# Altium PCB Luke_Optical_Fibre_IGBT_Driver_PCB.PcbDoc
Units mm, origin at the board's own origin, x right, y up, seen from the top; angles counter-clockwise.
Board outline 113.6 x 34.23 mm, 2 copper layers (Top Layer, Bottom Layer); 38 components, 25 nets, 106 pads, 346 vias.
Unrouted connection lines stored in the file: 1.
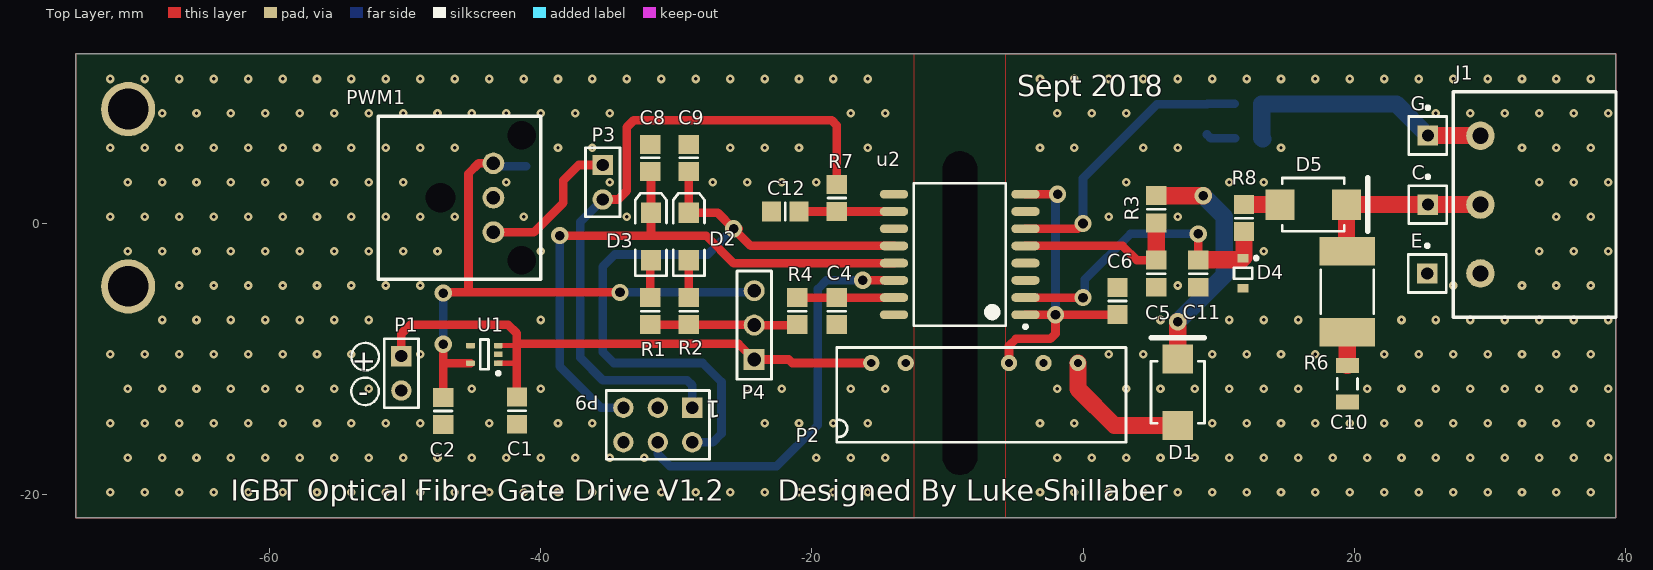
[diagram p0: Top Layer view]
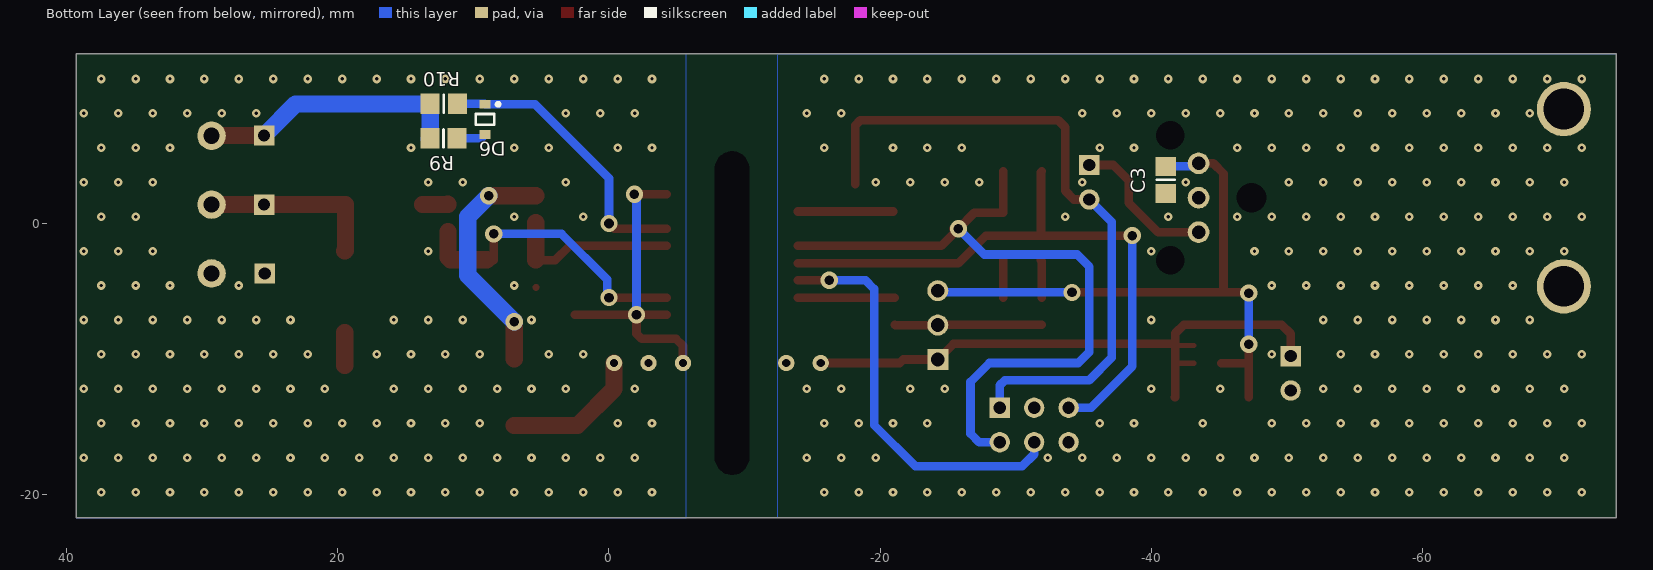
[diagram p1: Bottom Layer view, seen from below]

## Layer stack, top to bottom
Top Solder: solder mask 0.0102, Solder Resist, Dk 3.5
Top Layer: signal copper 0.0356
Dielectric 1: dielectric 0.32, FR-4, Dk 4.8
Bottom Layer: signal copper 0.0356
Bottom Solder: solder mask 0.0102, Solder Resist, Dk 3.5

## Board outline
-74.295,12.509 -74.295,-21.717 39.306,-21.717 39.306,12.509

## Design rules (kind name [scope] priority, off if disabled: settings)
Clearance "Schematic Clearance Constraint" [InNet('Collector/Drain')] p1: gap=3.048 ignorepadtopadclearanceinfootprint=FALSE except(0: Arc-Hole Track-Hole SMDPad-Hole THPad-Hole Via-Hole Fill-Hole Poly-Hole Region-Hole Text-Hole; 0.152: Arc-Text Track-Text SMDPad-Text THPad-Text Via-Text Fill-Text Poly-Text Region-Text Text-Text)
Clearance [All] p2: gap=0.152 ignorepadtopadclearanceinfootprint=FALSE except(0: Arc-Hole Track-Hole SMDPad-Hole THPad-Hole Via-Hole Fill-Hole Poly-Hole Region-Hole Text-Hole)
HoleSize [All] p1: absolutevalues=TRUE maxlimit=6.3 minlimit=0.2 maxpercent=80.000 minpercent=20.000
HoleToHoleClearance [All] p1: gap=0.152 allowstackedmicrovias=TRUE
MinimumSolderMaskSliver [All] p1: minsoldermaskwidth=0.152
PolygonConnect PolygonConnect_10 [All vs IsNamedPolygon('NONET_L02_P027')] p1: thpad.connectstyle=Relief thpad.reliefconductorwidth=0.254 thpad.reliefentries=4 thpad.polygonreliefangle="90 Angle" thpad.airgapwidth=0.254 smdpad.connectstyle=Relief smdpad.reliefconductorwidth=0.254 smdpad.reliefentries=4 smdpad.polygonreliefangle="90 Angle" smdpad.airgapwidth=0.254 via.connectstyle=Direct via.reliefconductorwidth=0.254 via.reliefentries=4 via.polygonreliefangle="90 Angle" via.airgapwidth=0.254
PolygonConnect PolygonConnect_9 [All vs IsNamedPolygon('Top Layer-No Emitter/Source')] p2: thpad.connectstyle=Relief thpad.reliefconductorwidth=0.254 thpad.reliefentries=4 thpad.polygonreliefangle="90 Angle" thpad.airgapwidth=0.254 smdpad.connectstyle=Relief smdpad.reliefconductorwidth=0.254 smdpad.reliefentries=4 smdpad.polygonreliefangle="90 Angle" smdpad.airgapwidth=0.254 via.connectstyle=Direct via.reliefconductorwidth=0.254 via.reliefentries=4 via.polygonreliefangle="90 Angle" via.airgapwidth=0.254
PolygonConnect PolygonConnect_8 [All vs IsNamedPolygon('Bottom Layer-GND')] p3: thpad.connectstyle=Relief thpad.reliefconductorwidth=0.254 thpad.reliefentries=4 thpad.polygonreliefangle="90 Angle" thpad.airgapwidth=0.254 smdpad.connectstyle=Relief smdpad.reliefconductorwidth=0.254 smdpad.reliefentries=4 smdpad.polygonreliefangle="90 Angle" smdpad.airgapwidth=0.254 via.connectstyle=Direct via.reliefconductorwidth=0.254 via.reliefentries=4 via.polygonreliefangle="90 Angle" via.airgapwidth=0.254
PolygonConnect PolygonConnect_7 [All vs IsNamedPolygon('Top Layer-Emitter')] p4: thpad.connectstyle=Relief thpad.reliefconductorwidth=0.254 thpad.reliefentries=4 thpad.polygonreliefangle="90 Angle" thpad.airgapwidth=0.254 smdpad.connectstyle=Relief smdpad.reliefconductorwidth=0.254 smdpad.reliefentries=4 smdpad.polygonreliefangle="90 Angle" smdpad.airgapwidth=0.254 via.connectstyle=Direct via.reliefconductorwidth=0.254 via.reliefentries=4 via.polygonreliefangle="90 Angle" via.airgapwidth=0.254
PolygonConnect PolygonConnect_6 [All vs IsNamedPolygon('Bottom Layer-Emitter')] p5: thpad.connectstyle=Relief thpad.reliefconductorwidth=0.254 thpad.reliefentries=4 thpad.polygonreliefangle="90 Angle" thpad.airgapwidth=0.254 smdpad.connectstyle=Relief smdpad.reliefconductorwidth=0.254 smdpad.reliefentries=4 smdpad.polygonreliefangle="90 Angle" smdpad.airgapwidth=0.254 via.connectstyle=Direct via.reliefconductorwidth=0.254 via.reliefentries=4 via.polygonreliefangle="90 Angle" via.airgapwidth=0.254
PolygonConnect PolygonConnect_5 [All vs IsNamedPolygon('Top Layer-GND 1')] p6: thpad.connectstyle=Relief thpad.reliefconductorwidth=0.254 thpad.reliefentries=4 thpad.polygonreliefangle="90 Angle" thpad.airgapwidth=0.254 smdpad.connectstyle=Relief smdpad.reliefconductorwidth=0.254 smdpad.reliefentries=4 smdpad.polygonreliefangle="90 Angle" smdpad.airgapwidth=0.254 via.connectstyle=Direct via.reliefconductorwidth=0.254 via.reliefentries=4 via.polygonreliefangle="90 Angle" via.airgapwidth=0.254
PolygonConnect PolygonConnect_4 [All vs IsNamedPolygon('EMITTER/SOURCE_L02_P016')] p7: thpad.connectstyle=Relief thpad.reliefconductorwidth=0.254 thpad.reliefentries=4 thpad.polygonreliefangle="90 Angle" thpad.airgapwidth=0.254 smdpad.connectstyle=Relief smdpad.reliefconductorwidth=0.254 smdpad.reliefentries=4 smdpad.polygonreliefangle="90 Angle" smdpad.airgapwidth=0.254 via.connectstyle=Direct via.reliefconductorwidth=0.254 via.reliefentries=4 via.polygonreliefangle="90 Angle" via.airgapwidth=0.254
PolygonConnect PolygonConnect_3 [All vs IsNamedPolygon('Top Layer-GND')] p8: thpad.connectstyle=Relief thpad.reliefconductorwidth=0.254 thpad.reliefentries=4 thpad.polygonreliefangle="90 Angle" thpad.airgapwidth=0.254 smdpad.connectstyle=Relief smdpad.reliefconductorwidth=0.254 smdpad.reliefentries=4 smdpad.polygonreliefangle="90 Angle" smdpad.airgapwidth=0.254 via.connectstyle=Direct via.reliefconductorwidth=0.254 via.reliefentries=4 via.polygonreliefangle="90 Angle" via.airgapwidth=0.254
PolygonConnect PolygonConnect_2 [All vs IsNamedPolygon('EMITTER/SOURCE_L02_P016')] p9: connectstyle=Relief reliefconductorwidth=0.254 reliefentries=4 polygonreliefangle="90 Angle" airgapwidth=0.254
PolygonConnect PolygonConnect_1 [All vs IsNamedPolygon('EMITTER/SOURCE_L02_P016')] p10: thpad.connectstyle=Direct thpad.reliefconductorwidth=0.254 thpad.reliefentries=4 thpad.polygonreliefangle="90 Angle" thpad.airgapwidth=0.254 smdpad.connectstyle=Relief smdpad.reliefconductorwidth=0.254 smdpad.reliefentries=4 smdpad.polygonreliefangle="90 Angle" smdpad.airgapwidth=0.254 via.connectstyle=Relief via.reliefconductorwidth=0.254 via.reliefentries=4 via.polygonreliefangle="90 Angle" via.airgapwidth=0.254
PolygonConnect [All] p11: connectstyle=Relief reliefconductorwidth=0.254 reliefentries=4 polygonreliefangle="90 Angle" airgapwidth=0.254
RoomDefinition Optical_Fibre_IGBT_Driver_Schematic [InComponentClass('Optical_Fibre_IGBT_Driver_Schematic')] p1: confinementstyle=ConfineIn formatcopy=TRUE lockcomponents=FALSE outline 63.484,-25.654 226.044,-25.654 226.044,-11.176 63.484,-11.176
RoutingVias [All] p1: holewidth=0.711 width=1.27 viastyle="Through Hole" minholewidth=0.711 minwidth=1.27 maxholewidth=0.711 maxwidth=1.27
SilkToSilkClearance [All] p1: silktosilkclearance=0.152
SilkToSolderMaskClearance [IsPad] p1: minsilkscreentomaskgap=0.152 clearancetoexposedcopper=TRUE
SolderMaskExpansion [All] p1: expansion=0.102
Width [All] p1: maxlimit=2.54 minlimit=0.254 preferedwidth=1.27 minimp=50.000000 maximp=50.000000 favimp=50.000000
25 further rules are at their usual default settings.

## Classes and differential pairs
net class HV: Collector/Drain
component class Optical_Fibre_IGBT_Driver_Schematic: C1 C2 C3 C4 C5 C6 C8 C9 C10 C11 C12 D1 D2 D3 D4 D5 D6 J1 P1 P2 P3 P4 P9 PWM1 R1 R2 R3 R4 R6 R7 R8 R9 R10 U1 u2

## Components (designator, comment, footprint, x,y, rotation, side; value= is the part's Value field where it differs from the comment)
C1 "Cap Semi" 6-0805_M -41.755,-13.806 r90 top value=1uF
C2 "Cap Semi" 6-0805_M -47.207,-13.827 r90 top value=1uF
C3 "Cap" 6-0805_M -41.084,3.223 r270 bottom value=100nF
C4 "Cap Semi" 6-0805_M -18.161,-6.461 r90 top value=1uF
C5 "Cap Semi" 6-0805_M 5.394,-3.699 r270 top value=1uF
C6 "Cap Semi" 6-0805_M 2.54,-5.715 r90 top value=1uF
C8 "Cap Semi" 6-0805_M -31.937,4.848 r270 top value=220pF
C9 "Cap Semi" 6-0805_M -29.083,4.848 r270 top value=220pF
C10 "Cap Semi" C1206 19.494,-11.827 r90 top value=220pF
C11 "Cap Semi" 6-0805_M 8.503,-3.699 r90 top value=220pF
C12 "Cap Semi" 6-0805_M -21.971,0.889 r0 top value=220pF
D1 "STTH212U" GESC-GAP3SLT33-214-2_V 6.985,-12.446 r90 top
D2 "Led_Green" 3.2X1.6X1.1 -29.083,-0.957 r90 top
D3 "LED_Red" 3.2X1.6X1.1 -31.877,-0.957 r90 top
D4 "BAT165" ONSC-SOD-323-2-477-02_V 11.811,-3.662 r270 top
D5 "STTH212U" GESC-GAP3SLT33-214-2_V 16.981,1.397 r0 top
D6 "BAT165" ONSC-SOD-323-2-477-02_V 9.144,7.683 r270 bottom
J1 "CTBP9358/3" CTBP9358/3 29.321,1.397 r0 top
P1 "5V Power In" HDR1X2 -50.292,-9.779 r270 top
P2 "CUI INC DC/DC" DIP10 -15.621,-15.24 r90 top
P3 "Optical Fibre Enable Header" HDR1X2 -35.433,4.318 r270 top
P4 "TSW-103-07-F-S" SMTC-TSW-103-07-X-S -24.257,-10.033 r90 top
P5 "Emitter" PIN1 25.4,-3.683 r0 top
P8 "Collector" PIN1 25.44,1.397 r0 top
P9 "Header 3X2A" HDR2X3_CEN -28.829,-13.589 r180 top
P10 "Gate" PIN1 25.44,6.493 r0 top
PWM1 "GP1FAV31RK0F" GP1FAV31*K0F -43.497,1.905 r180 top
R1 "Res3" 6-0805_M -31.937,-6.461 r90 top value=10K
R2 "Res3" 6-0805_M -29.083,-6.461 r90 top value=10K
R3 "Res3" 6-0805_M 5.394,1.055 r270 top value=2R2
R4 "Res3" 6-0805_M -21.082,-6.461 r270 top value=10R
R6 "snubber_10Ohm_2w" SMDres 19.494,-5.032 r90 top
R7 "Res3" 6-0805_M -18.161,1.889 r90 top value=10K
R8 "Res3" 6-0805_M 11.871,0.397 r90 top value=1K
R9 "Res3" 6-0805_M 12.208,6.286 r180 bottom value=6.8
R10 "Res3" 6-0805_M 12.192,8.826 r180 bottom value=6.8
U1 "TLV70012DCKT" DCK0005A_L -44.168,-9.652 r180 top
u2 "ISO5451" SOIC127P1030X265-16M -9.097,-2.286 r180 top

## Footprints (in the part's own frame and the unit in brackets; to place one, negate y for a bottom-side part, rotate by r counter-clockwise, add the part's x,y. Pads: shape width x height; smd on the part's side, far side on the other; paste and mask are expansions set on the pad)
3.2X1.6X1.1 [mm] "SMT LED; 2 Flat Leads"
  rect 1.5x1.5 smd: 1(-1.75,0) 2(1.75,0)
  silkscreen extent -2.9,-1.15 3.2,1.15
6-0805_M [mm] "Chip Resistor, Body 2.0x1.2mm, IPC Low Density"
  rect 1.4x1.5 smd: 1(-1,0) 2(1,0)
  silkscreen extent 0,-0.65 0,0.65, body extent -1.07,-0.7 1.07,0.7, height 0.7
C1206 [mm] "Chip Capacitor, Body 3.2x1.6mm, IPC High Density"
  rect 1.1x1.7 smd: 1(-1.35,0) 2(1.35,0)
  silkscreen extent -0.4,-0.75 0.4,0.75, body extent -1.7,-0.9 1.7,0.9, height 1.3
CTBP9358/3 [mm] "CTBP9358/3 -  Terminal Block, Closed Ended, Header, 5.08 mm, 3 Ways, Through Hole Right Angle"
  round 2.1 hole 1.2: 1(0,-5.08) 2(0,0) 3(0,5.08)
  silkscreen extent -2,-8.32 10,8.32, body extent -2,-8.32 10,8.32, height 7.25
DCK0005A_L [mm] "SOT23, 5-Leads, Body 2.15x1.4mm, Pitch 0.65mm, IPC High Density"
  rrect25% 0.65x0.4 smd: 1(-1.025,0.65) 2(-1.025,0) 3(-1.025,-0.65) 4(1.025,-0.65) 5(1.025,0.65)
  silkscreen extent -1.15,-1.1 0.3,1.52, body extent -1.14,-1 1.14,1, height 0.94
DIP10 [mm]
  round 1.2 hole 0.6: 1(4.953,0) 2(4.953,-2.54) 5(4.953,-10.16) 6(4.953,-12.7) 7(4.953,-15.24)
  silkscreen extent -0.9,-18.8 6.1,2.54, body extent -1,-18.9 6.2,2.64, height 12.5
GESC-GAP3SLT33-214-2_V [mm] "Molded Diode, 2-Leads, Body 4.57x3.94mm"
  rect 2.16x2.26 smd: 1(-2.45,0) 2(2.45,0)
  silkscreen extent -2.29,-1.97 4.03,1.97, body extent -2.5,-1.97 2.5,1.97, height 2.2
GP1FAV31*K0F [mm] "Fiber Optic Transmitter/Receiver"
  round 0 hole 2.1 unplated: 0(-2.1,4.6) 0(-2.1,-4.6)
  round 0 hole 2.2 unplated: 0(3.9,0)
  round 1.6 hole 1: 1(0,-2.54) 2(0,0) 3(0,2.54)
  silkscreen extent -3.5,-6 8.5,6, body extent -3.5,-6 11.1,6, height 19
HDR1X2 [mm] "Connector; Header; 2 Position"
  rect 1.5x1.5 hole 0.9: 1(0,0)
  round 1.5 hole 0.9: 2(2.54,0)
  silkscreen extent -1.27,-1.27 3.81,1.27
HDR2X3_CEN [mm] "Connector; Header; 3x2 Position"
  rect 1.5x1.5 hole 0.9: 1(0,0)
  round 1.5 hole 0.9: 2(2.54,0) 3(5.08,0) 4(0,2.54) 5(2.54,2.54) 6(5.08,2.54)
  silkscreen extent -1.27,-1.27 6.35,3.81
ONSC-SOD-323-2-477-02_V [mm] "SOD, 2-Leads, Body 1.7x1.25mm"
  rect 0.63x0.83 smd: 1(-1.115,0) 2(1.115,0)
  silkscreen extent -1.24,-0.67 0.4,1.09, body extent -0.85,-0.63 0.85,0.63, height 1.06
PIN1 [mm] "Connector; Plug"
  rect 1.5x1.5 hole 0.9: 1(0,0)
  silkscreen extent -1.4,-1.4 1.4,2.17
SMDres [mm] "Chip Resistor, 2-Leads, Body 6.40x3.20mm, IPC Low Density"
  rect 2.1x4.1 smd: 1(-3,0) 2(3,0)
  silkscreen extent -1.6,-1.95 1.6,1.95, body extent -3.3,-1.7 3.3,1.7, height 0.8
SMTC-TSW-103-07-X-S [mm] ".025 SQ Post Terminal Strip Assembly, 1x3 Pins, Vertical, 2.54mm Pitch, Male"
  rect 1.55x1.55 hole 1.02: 1(0,0)
  round 1.55 hole 1.02: 2(2.54,0) 3(5.08,0)
  silkscreen extent -1.46,-1.27 6.54,1.27, body extent -1.27,-1.27 6.35,1.27, height 8.38
SOIC127P1030X265-16M [mm] "SOIC, 16-Leads, Body 10.30x7.50mm, Pitch 1.27mm, IPC Low Density"
  oval 2.1x0.65 smd: 1(-4.85,4.445) 2(-4.85,3.175) 3(-4.85,1.905) 4(-4.85,0.635) 5(-4.85,-0.635) 6(-4.85,-1.905) 7(-4.85,-3.175) 8(-4.85,-4.445) 9(4.85,-4.445) 10(4.85,-3.175) 11(4.85,-1.905) 12(4.85,-0.635) 13(4.85,0.635) 14(4.85,1.905) 15(4.85,3.175) 16(4.85,4.445)
  silkscreen extent -4.98,-5.25 3.4,5.44, body extent -5.15,-5.25 5.15,5.25, height 2.65

## Part data
C1 C2 C4 C5 C6 C8 C9 C10 C11 C12: "Capacitor (Semiconductor SIM Model)", LatestRevisionDate=29-May-2009, LatestRevisionNote="IPC-7351 Footprint Added.", PackageDescription="Chip Capacitor", PackageReference=C1206, Published=8-Jun-2000, Publisher="Altium Limited"
C3: "Capacitor", LatestRevisionDate=17-Jul-2002, LatestRevisionNote="Re-released for DXP Platform.", PackageDescription="Radial Cap, Thru-Hole; 2 Leads; 0.3 in Pin Spacing", PackageReference=RAD-0.3, Published=8-Jun-2000, Publisher="Altium Limited"
D1 D5: library part CMP-2000-05135-1, "Silicon Carbide Power Schottky Diode, 3300 V, - 0.3 A, -55 to 175 degC, 2-Pin SMD, RoHS, Tape and Reel", If - Forward Current=0.3A, Ifsm - Forward Surge Current=10A, Ir - Reverse Current=100uA, Manufacturer=GeneSiCSemiconductor, Maximum Operating Temperature=+175C, Minimum Operating Temperature=-55C, Operating Temperature Range=-55Cto+175C, Package / Case=DO-214AA, Package Description="2-Pin Chip, Body 4.57 x 3.94 mm", Package Version="Rev. 1, 11/2013", Pd - Power Dissipation=25W, Vf - Forward Voltage=4V, Vrrm - Repetitive Reverse Voltage=3300V, Brand=GeneSiCSemiconductor, Configuration=Single, Datasheet URL=https://datasheet.ciiva.com/24141/gap3slt33-214-271329-24141300.pdf, Datasheet Version="Rev. 1, 11/2013", Factory Pack Quantity=2500, Manufacturer URL=http://www.genesicsemi.com/, Mounting Style=SMD/SMT, Package URL=https://datasheet.ciiva.com/24141/gap3slt33-214-271329-24141300.pdf, Packaging=Reel, Product=SchottkySiliconCarbideDiodes, Product Category=SchottkyDiodes&Rectifiers, RoHS=True, Series=GAP3SLT33, Technology=SiC, trr - Reverse Recovery time=60ns, Unit Weight=0.003284oz
D2 D3: library part LED2, "Typical RED, GREEN, YELLOW, AMBER GaAs LED", LatestRevisionDate=17-Jul-2002, LatestRevisionNote="Re-released for DXP Platform.", PackageDescription="SM LED; 2 Flat Leads", PackageReference=3.2X1.6X1.1, PackageVersion=Feb-2002, Published=8-Jun-2000, Publisher="Altium Limited"
D4 D6: library part CMP-1055-00472-1, "Schottky Barrier Diode, 2-Pin SOD-323, Pb-Free, Tape and Reel", Manufacturer="On Semiconductor", PartNumber=NSR0340HT1G, ComponentLink1Description="Manufacturer URL", ComponentLink1URL=http://www.onsemi.com/, ComponentLink2Description=Datasheet, ComponentLink2URL=http://www.onsemi.cn/pub_link/Collateral/NSR0340H-D.PDF, ComponentLink3Description="Package Specification", ComponentLink3URL=http://www.onsemi.com/pub_link/Collateral/477-02.PDF.1, Configuration=Single, DatasheetVersion="Rev. 1", IFSM Max (A)=1, Mounting Technology="Surface Mount", PackageDescription="2-Pin SOD, Body 1.7 x 1.25 mm", PackageReference=SOD-323-2-477-02, PackageVersion="Rev. H, 03/2007", Packing="Tape and Reel", RoHS=TRUE
J1: "CTBP9358/3 -  Terminal Block, Closed Ended, Header, 5.08 mm, 3 Ways, Through Hole Right Angle"
P1 P3: library part "Header 2", "Header, 2-Pin", LatestRevisionDate=17-Jul-2002, LatestRevisionNote="Re-released for DXP Platform.", Publisher="Altium Limited"
P2: library part Component_1, "Isolated DC DC Converter", LatestRevisionDate=17-Jul-2002, LatestRevisionNote="Re-released for DXP Platform.", Publisher="Altium Limited"
P4: library part CMP-1024-00331-1, "0.025\" SQ Post Header, Through-hole, Vertical, -55 to 125 degC, 2.54 mm Pitch, 3-Pin, Male, RoHS", Manufacturer=Samtec, Temperature Range="-55 to 125 degC", ComponentLink1Description="Manufacturer URL", ComponentLink1URL=http://www.samtec.com, ComponentLink2Description=Datasheet, ComponentLink2URL=http://www.samtec.com/documents/webfiles/pdf/TSW_TH.PDF, ComponentLink3Description="Package Specification", ComponentLink3URL=http://www.samtec.com/documents/webfiles/cpdf/TSW-XXX-XX-XXX-X-XX-XXX-MKT.pdf, DatasheetVersion=F-214, Mounting Technology=Through-hole, Orientation=Vertical, PackageDescription=".025[0.64] SQ. Post Terminal Strip Assembly", PackageReference=TSW-103-07-X-S, PackageVersion="DM, 8/1988", PartNumber=TSW-103-07-F-S, Pitch="2.54 mm", RoHS=True
P5 P8 P10: library part Plug, "Plug", LatestRevisionDate=17-Jul-2002, LatestRevisionNote="Re-released for DXP Platform.", Publisher="Altium Limited"
P9: "Header, 3-Pin, Dual row", LatestRevisionDate=17-Jul-2002, LatestRevisionNote="Re-released for DXP Platform.", Publisher="Altium Limited"
PWM1: "Fiber Optic Receiver, 15.5 Mbps"
R1 R2 R3 R4 R7 R8 R9 R10: "Resistor", LatestRevisionDate=29-May-2009, LatestRevisionNote="IPC-7351 Footprint Added.", PackageDescription="Chip Resistor", PackageReference=J1-0603, Published=8-Jun-2000, Publisher="Altium Limited"
R6: library part "Shunt resistor", "SMD Shunt resistor"
U1: library part CMP-0394-00926-2, "Single Output LDO, 200 mA, Fixed 1.2 V Output, 2 to 5.5 V Input, with Low IQ, 5-pin SC70 (DCK), -40 to 125 degC, Green (RoHS & no Sb/Br)", Manufacturer="Texas Instruments", Accuracy(%)=2, Code_JEDEC=MO-203, ComponentLink1Description="Manufacturer URL", ComponentLink1URL=http://www.ti.com/, ComponentLink2Description=Datasheet, ComponentLink2URL=http://www.ti.com/general/docs/lit/getliterature.tsp?genericPartNumber=TLV70012&fileType=pdf, ComponentLink3Description="Package Specification", ComponentLink3URL=http://www.ti.com/litv/pdf/mpds025f, DatasheetVersion=SLVSA00D, Eco-Plan="Green (RoHS & no Sb/Br)", Fixed Output Options(V)=1.2, Iout(Max)(A)=0.2, Iq(Typ)(mA)=0.03, Mounting Technology="Surface Mount", PackageDescription="5-Pin Plastic Small-Outline, Body 2 x 1.25 mm, Pitch 0.65 mm", PackageReference=DCK0005A, PackageVersion=4093553-3/G, PartNumber=TLV70012DCKT, SubFamily="Single Channel LDO", Vdo(Typ)(mV)=175, Vin(Max)(V)=5.5, Vin(Min)(V)=2, Vout Adj(Max)(V)=1.2, Vout Adj(Min)(V)=1.2
u2: library part Component_1

## Free pads (board coordinates)
  round 4 hole 3: 2(-70.448,8.445) 3(-70.448,-4.635)
  round 0 hole 23.876 slot 2.54 at 0 deg unplated: 4(-9.08,-6.604)

## Via types
v1: diameter 0.635, hole 0.254, Top Layer to Bottom Layer, tented both sides, 333 vias
v2: diameter 1.27, hole 0.711, Top Layer to Bottom Layer, 13 vias

## Nets (pads, with @x,y where several pads share a name; then routed paths per layer and width w, separated by ;. In a path a pad name is that pad's centre, name@x,y a point inside that pad or via, vN(x,y) a via of type N, cw(c..) or ccw(c..) an arc to the next point about the centre after c; other vN are vias at no path point)
3.3V: C2.2 C3.1 P4.3 PWM1.1 U1.5 | length 46.5
  Top Layer w0.635: C2.2 -47.197,-12.817 -47.197,-10.287 ; v2(-47.197,-8.907) -47.197,-10.287 ; v2(-47.197,-5.134) -47.143,-5.08 -45.339,-5.08 ; U1.5 -47.182,-10.302 -47.197,-10.287 ; PWM1.1 -44.577,4.445 -45.339,3.683 -45.339,-5.08 ; v2(-34.163,-5.08) -45.339,-5.08
  Bottom Layer w0.635: v2(-47.197,-8.907) v2(-47.197,-5.134) ; PWM1.1 -43.275,4.223 C3.1 ; v2(-34.163,-5.08) -24.384,-5.08 P4.3 P4.3@-24.511,-4.699
5V: C1.2 P1.1 P2.1 P4.1 U1.1 U1.3 | length 44.1
  Top Layer w0.381: U1.1 -41.783,-10.302 ; U1.3 -41.905,-9.002 -41.783,-8.881
  Top Layer w0.635: P1.1 -50.292,-8.128 -49.625,-7.461 -42.418,-7.461 -41.783,-8.096 -41.783,-8.881 -25.409,-8.881 P4.1 -21.717,-10.033 -21.463,-10.287 -16.256,-10.287 ; -41.783,-9.08 -41.783,-10.302 -41.783,-12.779 C1.2
Collector/Drain: D5.2 J1.2 P8.1 R6.2 | length 13.4
  Top Layer w1.27: R6.2 19.431,-1.968 D5.2 25.378,1.397 25.409,1.428 P8.1 J1.2
Emitter/Source: C5.2 C6.2 C10.1 C11.1 D4.2 J1.1 P2.6 P5.1 u2.3 | length 0
  Top Layer w0.508: C5.2@5.378,-4.715 C5.2
  other v1: -3.175,-19.812 -0.635,-19.812 1.905,-19.812 4.445,-19.812 6.985,-19.812 9.525,-19.812 12.065,-19.812 14.605,-19.812 17.145,-19.812 19.685,-19.812 22.225,-19.812 24.765,-19.812 27.305,-19.812 29.845,-19.812 32.385,-19.812 34.925,-19.812 37.465,-19.812 -1.905,-17.272 0.635,-17.272 3.175,-17.272 5.715,-17.272 8.255,-17.272 10.795,-17.272 13.335,-17.272 15.875,-17.272 18.415,-17.272 20.955,-17.272 23.495,-17.272 26.035,-17.272 28.575,-17.272 31.115,-17.272 33.655,-17.272 36.195,-17.272 38.735,-17.272 -3.175,-14.732 -0.635,-14.732 9.525,-14.732 12.065,-14.732 14.605,-14.732 17.145,-14.732 19.685,-14.732 22.225,-14.732 24.765,-14.732 27.305,-14.732 29.845,-14.732 32.385,-14.732 34.925,-14.732 37.465,-14.732 -1.905,-12.192 3.175,-12.192 5.715,-12.192 8.255,-12.192 10.795,-12.192 13.335,-12.192 15.875,-12.192 20.955,-12.192 23.495,-12.192 26.035,-12.192 28.575,-12.192 31.115,-12.192 33.655,-12.192 36.195,-12.192 38.735,-12.192 1.905,-9.652 4.445,-9.652 9.525,-9.652 12.065,-9.652 14.605,-9.652 17.145,-9.652 22.225,-9.652 24.765,-9.652 27.305,-9.652 29.845,-9.652 32.385,-9.652 34.925,-9.652 37.465,-9.652 5.715,-7.112 10.795,-7.112 13.335,-7.112 15.875,-7.112 23.495,-7.112 26.035,-7.112 28.575,-7.112 31.115,-7.112 33.655,-7.112 36.195,-7.112 38.735,-7.112 6.985,-4.572 27.305,-4.572 32.385,-4.572 34.925,-4.572 37.465,-4.572 13.335,-2.032 33.655,-2.032 36.195,-2.032 38.735,-2.032 1.905,0.508 6.985,0.508 34.925,0.508 37.465,0.508 3.175,3.048 10.795,3.048 13.335,3.048 33.655,3.048 36.195,3.048 38.735,3.048 -3.175,5.588 -0.635,5.588 4.445,5.588 6.985,5.588 14.605,5.588 32.385,5.588 34.925,5.588 37.465,5.588 -1.905,8.128 0.635,8.128 3.175,8.128 26.035,8.128 28.575,8.128 31.115,8.128 33.655,8.128 36.195,8.128 38.735,8.128 -3.175,10.668 -0.635,10.668 1.905,10.668 4.445,10.668 6.985,10.668 9.525,10.668 12.065,10.668 14.605,10.668 17.145,10.668 19.685,10.668 22.225,10.668 24.765,10.668 27.305,10.668 29.845,10.668 32.385,10.668 34.925,10.668 37.465,10.668
Flt: C8.2 D3.2 P9.3 u2.13 | length 46
  Top Layer w0.635: v2(-38.608,-0.889) -31.877,-0.889 ; C8.2 -31.877,3.787 D3.2 -31.877,-0.889 ; u2.13 -25.781,-2.921 -27.813,-0.889 -31.877,-0.889
  Bottom Layer w0.635: v2(-38.608,-0.889) -38.608,-10.541 -35.56,-13.589 -34.163,-13.589 P9.3@-33.909,-13.335
Gate: J1.3 P10.1 R9.1 R10.1 | length 19.7
  Top Layer w1.27: P10.1 J1.3@29.337,6.493
  Bottom Layer w1.27: R9.1@13.255,6.239 R9.1 13.192,6.302 R10.1 23.106,8.826 P10.1
GND: C1.1 C2.1 C3.2 C4.1 C8.1 C9.1 C12.1 P1.2 P2.2 P9.6 PWM1.2 U1.2 u2.9 u2.11 u2.16
  other v1: -71.755,-19.812 -69.215,-19.812 -66.675,-19.812 -64.135,-19.812 -61.595,-19.812 -59.055,-19.812 -56.515,-19.812 -53.975,-19.812 -51.435,-19.812 -48.895,-19.812 -46.355,-19.812 -43.815,-19.812 -41.275,-19.812 -38.735,-19.812 -36.195,-19.812 -33.655,-19.812 -31.115,-19.812 -28.575,-19.812 -26.035,-19.812 -23.495,-19.812 -20.955,-19.812 -18.415,-19.812 -15.875,-19.812 -70.485,-17.272 -67.945,-17.272 -65.405,-17.272 -62.865,-17.272 -60.325,-17.272 -57.785,-17.272 -55.245,-17.272 -52.705,-17.272 -50.165,-17.272 -47.625,-17.272 -45.085,-17.272 -42.545,-17.272 -40.005,-17.272 -37.465,-17.272 -34.925,-17.272 -32.385,-17.272 -19.685,-17.272 -17.145,-17.272 -14.605,-17.272 -71.755,-14.732 -69.215,-14.732 -66.675,-14.732 -64.135,-14.732 -61.595,-14.732 -59.055,-14.732 -56.515,-14.732 -53.975,-14.732 -51.435,-14.732 -48.895,-14.732 -43.815,-14.732 -38.735,-14.732 -36.195,-14.732 -23.495,-14.732 -20.955,-14.732 -18.415,-14.732 -15.875,-14.732 -70.485,-12.192 -67.945,-12.192 -65.405,-12.192 -62.865,-12.192 -60.325,-12.192 -57.785,-12.192 -55.245,-12.192 -52.705,-12.192 -45.085,-12.192 -40.005,-12.192 -24.765,-12.192 -22.225,-12.192 -17.145,-12.192 -14.605,-12.192 -71.755,-9.652 -69.215,-9.652 -66.675,-9.652 -64.135,-9.652 -61.595,-9.652 -59.055,-9.652 -56.515,-9.652 -53.975,-9.652 -48.895,-9.652 -67.945,-7.112 -65.405,-7.112 -62.865,-7.112 -60.325,-7.112 -57.785,-7.112 -55.245,-7.112 -52.705,-7.112 -40.005,-7.112 -66.675,-4.572 -64.135,-4.572 -61.595,-4.572 -59.055,-4.572 -56.515,-4.572 -53.975,-4.572 -51.435,-4.572 -48.895,-4.572 -70.485,-2.032 -67.945,-2.032 -65.405,-2.032 -62.865,-2.032 -60.325,-2.032 -57.785,-2.032 -55.245,-2.032 -52.705,-2.032 -50.165,-2.032 -47.625,-2.032 -40.005,-2.032 -71.755,0.508 -69.215,0.508 -66.675,0.508 -64.135,0.508 -61.595,0.508 -59.055,0.508 -56.515,0.508 -53.975,0.508 -51.435,0.508 -48.895,0.508 -46.355,0.508 -41.275,0.508 -33.655,0.508 -70.485,3.048 -67.945,3.048 -65.405,3.048 -62.865,3.048 -60.325,3.048 -57.785,3.048 -55.245,3.048 -52.705,3.048 -50.165,3.048 -42.545,3.048 -34.925,3.048 -27.305,3.048 -24.765,3.048 -22.225,3.048 -19.685,3.048 -71.755,5.588 -69.215,5.588 -66.675,5.588 -64.135,5.588 -61.595,5.588 -59.055,5.588 -56.515,5.588 -53.975,5.588 -51.435,5.588 -48.895,5.588 -46.355,5.588 -38.735,5.588 -36.195,5.588 -26.035,5.588 -23.495,5.588 -20.955,5.588 -15.875,5.588 -67.945,8.128 -65.405,8.128 -62.865,8.128 -60.325,8.128 -57.785,8.128 -55.245,8.128 -52.705,8.128 -50.165,8.128 -47.625,8.128 -45.085,8.128 -42.545,8.128 -40.005,8.128 -37.465,8.128 -34.925,8.128 -17.145,8.128 -14.605,8.128 -71.755,10.668 -69.215,10.668 -66.675,10.668 -64.135,10.668 -61.595,10.668 -59.055,10.668 -56.515,10.668 -53.975,10.668 -51.435,10.668 -48.895,10.668 -46.355,10.668 -43.815,10.668 -41.275,10.668 -38.735,10.668 -36.195,10.668 -33.655,10.668 -31.115,10.668 -28.575,10.668 -26.035,10.668 -23.495,10.668 -20.955,10.668 -18.415,10.668 -15.875,10.668
NetC4_2: C4.2 R4.1 u2.15 | length 7.1
  Top Layer w0.635: R4.1 C4.2 u2.15
NetC5_1: C5.1 R3.2 u2.5 | length 12.8
  Top Layer w0.635: u2.5 2.921,-1.651 3.969,-2.699 C5.1
  Top Layer w1.27: C5.1 R3.2
NetC6_1: C6.1 P2.5 u2.1 u2.8 | length 24.7
  Top Layer w0.508: u2.1 u2.1@-4.231,-6.715 ; C6.1@2.524,-6.731 C6.1
  Top Layer w0.635: P2.5 -5.461,-9.017 -4.953,-8.509 -2.413,-8.509 -2.032,-8.128 v2(-2.032,-6.731) ; u2.1 v2(-2.032,-6.731) ; u2.8 v2(-1.877,2.159) ; C6.1@2.524,-6.731 v2(-2.032,-6.731)
  Bottom Layer w0.635: v2(-2.032,-6.731) -2.032,2.159 v2(-1.877,2.159)
NetC10_2: C10.2 R6.1 | length 2.4
  Top Layer w1.27: C10.2 R6.1
NetC11_2: C11.2 D4.1 R8.1 u2.2 | length 22.2
  Top Layer w0.635: u2.2 v2(0,-5.461) ; C11.2 v2(8.503,-0.762)
  Top Layer w1.27: C11.2@9.017,-2.667 11.691,-2.667 D4.1 11.871,-2.487 R8.1
  Bottom Layer w0.635: v2(0,-5.461) 0.127,-5.334 0.127,-4.127 3.492,-0.762 v2(8.503,-0.762)
NetC12_2: C12.2 R7.1 u2.10 | length 7
  Top Layer w0.635: C12.2 R7.1 u2.10
NetD1_1: D1.1 P2.7 | length 10.4
  Top Layer w1.27: P2.7 -0.381,-12.192 2.323,-14.896 D1.1
NetD1_2: D1.2 R3.1 | length 17.6
  Top Layer w1.27: R3.1 v2(8.867,2.055) ; D1.2 v2(6.985,-7.239)
  Bottom Layer w1.27: v2(6.985,-7.239) 10.414,-3.81 10.414,0.508 v2(8.867,2.055)
NetD2_1: D2.1 R2.2 | length 2.8
  Top Layer w0.635: R2.2 D2.1
NetD3_1: D3.1 R1.2 | length 2.8
  Top Layer w0.635: R1.2 -31.937,-2.767 D3.1
NetD5_1: D5.1 R8.2 | length 1.9
  Top Layer w1.27: R8.2@11.901,1.427 R8.2 D5.1@13.761,1.397
NetD6_1: D6.1 R10.2 u2.6 | length 21.2
  Top Layer w0.635: u2.6 -0.381,-0.381 v2(0,0)
  Bottom Layer w0.635: v2(0,0) 0,3.337 5.461,8.798 D6.1 9.172,8.826 R10.2
NetD6_2: D6.2 R9.2 | length 2.2
  Bottom Layer w0.635: D6.2 9.426,6.286 R9.2
NetP3_1: P3.1 PWM1.3 | length 11.3
  Top Layer w0.635: PWM1.3 -40.513,-0.635 -38.354,1.524 -38.354,3.175 -37.211,4.318 P3.1
  Bottom Layer w0.635: P3.1@-35.56,4.445 P3.1
Pulse_in: P3.2 P9.1 R7.2 | length 49.8
  Top Layer w0.635: P3.2 -34.29,1.778 -33.655,2.413 -33.655,7.112 -33.147,7.62 -18.542,7.62 -18.161,7.239 R7.2
  Bottom Layer w0.635: P3.2 -37.084,0.127 -37.084,-9.906 -35.433,-11.557 -29.21,-11.557 -28.829,-11.938 P9.1@-28.829,-13.335
Rdy: C9.2 D2.2 P9.4 u2.12 | length 52.6
  Top Layer w0.635: C9.2 D2.2 -26.955,0.793 v2(-25.781,-0.381) ; v2@-25.4,-0.381 v2(-25.781,-0.381) ; u2.12 -24.511,-1.651 v2(-25.781,-0.381)
  Bottom Layer w0.635: P9.4 -27.305,-16.129 -26.67,-15.494 -26.67,-11.684 -28.067,-10.287 -34.624,-10.287 -35.433,-9.478 -35.433,-3.175 -34.544,-2.286 -27.686,-2.286 v2(-25.781,-0.381)
Rst: P9.5 u2.14 | length 30.5
  Top Layer w0.635: v2(-16.256,-4.191) u2.14
  Bottom Layer w0.635: P9.5@-31.369,-15.875 P9.5 -31.369,-17.018 -30.48,-17.907 -22.606,-17.907 -19.558,-14.859 -19.558,-4.826 -18.923,-4.191 v2(-16.256,-4.191)
VCC: P4.2 R1.1 R2.1 R4.2 | length 10.9
  Top Layer w0.635: R1.1 R2.1 -24.289,-7.461 P4.2 -21.114,-7.493 R4.2
pads on no net: P9.2 PWM1.0 U1.4 u2.4 u2.7

## Polygon pours and split planes (outlines as drawn)
Emitter/Source on Top Layer "Top Layer-No Emitter/Source" (solid, shelved, pour order 29): 39.306,12.509 39.306,-21.717 -5.715,-21.717 -5.715,12.509
GND on Top Layer "Top Layer-GND" (solid, shelved, pour order 14): -74.295,12.509 -74.295,-21.717 -12.446,-21.717 -12.446,12.509
Emitter/Source on Bottom Layer "NONET_L02_P027" (solid, shelved, pour order 27): 39.306,12.509 39.306,-21.717 -5.715,-21.717 -5.715,12.509
GND on Bottom Layer "Bottom Layer-GND" (solid, shelved, pour order 18): -74.295,12.509 -74.295,-21.717 -12.446,-21.717 -12.446,12.509

## Silkscreen, mask and mechanical layers (free items; w line width, h text height)
Top Overlay:
  circle w0.178: c-52.959,-9.822 r1.016
  circle w0.178: c-52.972,-12.377 r1.016
  text "Sept 2018" at -4.852,9.398 h1.52
  text "G" at 24.194,8.319 h1.02
  text "C" at 24.257,3.238 h1.02
  text "E" at 24.194,-1.778 h1.02
  text "+" at -53.721,-9.314 h1.52 r270
  text "-" at -53.48,-13.139 h1.52
  text "IGBT Optical Fibre Gate Drive V1.2      Designed By Luke Shillaber" at -62.865,-20.447 h1.52

## Text inside footprints (layer, text, board x,y; h text height)
P9: Top Overlay "1" at -26.733,-13.081 h1.27 r180